# Altium PCB SD-TF.PcbDoc
Units mil, origin at the board's own origin, x right, y up, seen from the top; angles counter-clockwise.
Board outline 6000 x 4000 mil, 2 copper layers (Top Layer, Bottom Layer); 10 components, 13 nets, 51 pads, 10 vias.
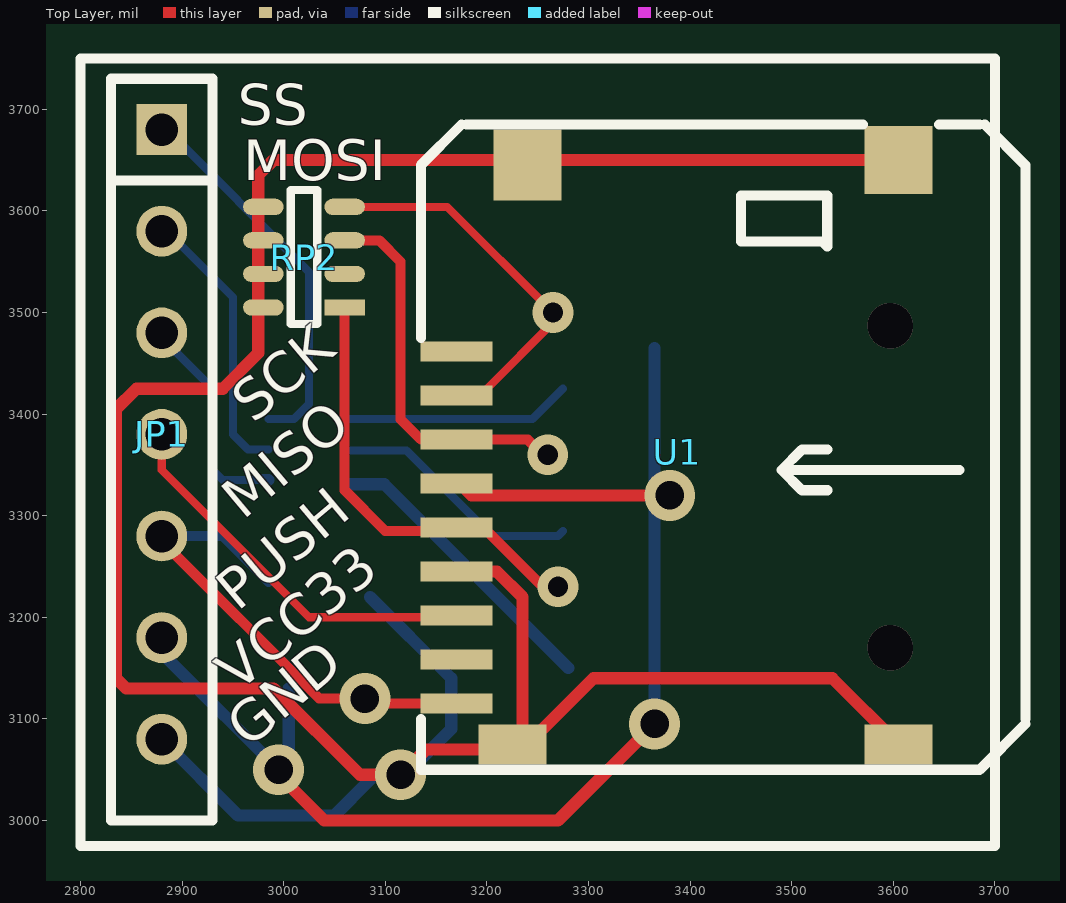
[diagram p0: Top Layer view]
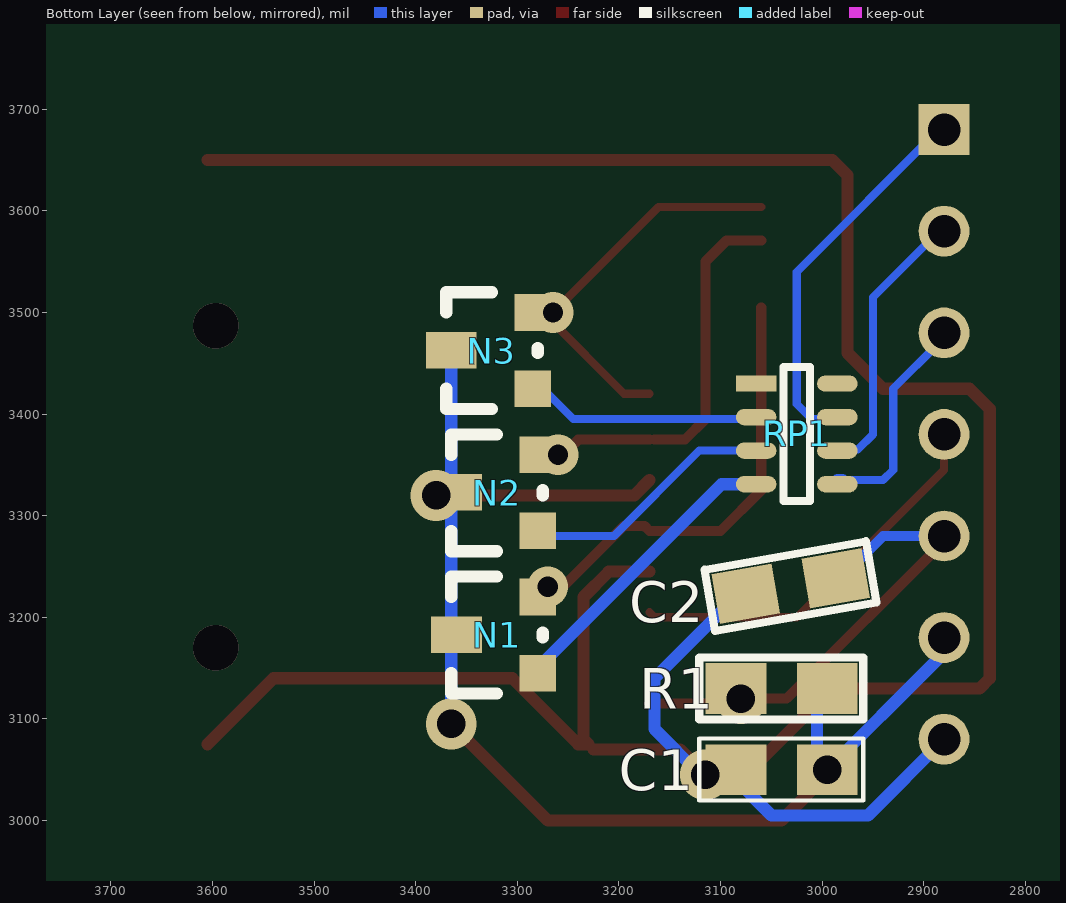
[diagram p1: Bottom Layer view, seen from below]

## Layer stack, top to bottom
Top Layer: signal copper 1.4
Dielectric: dielectric 12.6, FR-4, Dk 4.8
Bottom Layer: signal copper 1.4

## Board outline
1000,1000 7000,1000 7000,5000 1000,5000

## Design rules (kind name [scope] priority, off if disabled: settings)
Clearance [All] p1: gap=10
ComponentClearance [All] p1: gap=10 collisioncheckmode=3 verticalgap=10
PolygonConnect [All] p1: connectstyle=Relief reliefconductorwidth=10 reliefentries=4 polygonreliefangle="90 Angle"
RoutingVias [All] p1: holewidth=28 width=40 viastyle="Through Hole" minholewidth=20 minwidth=40 maxholewidth=28 maxwidth=50
SolderMaskExpansion [All] p1: expansion=4
TestPointUsage [All] p1: valid=0 allowmultiple=FALSE
Testpoint [All] p1: side=15 testpointundercomponent=TRUE minsize=40 maxsize=100 preferedsize=60 minholesize=0 maxholesize=40 preferedholesize=32 testpointgrid=1 style=1023 order=0123456789
Width [All] p1: maxlimit=12 minlimit=6 preferedwidth=10 minimp=50.000000 maximp=50.000000 favimp=50.000000
18 further rules are at their usual default settings.

## Components (designator, comment, footprint, x,y, rotation, side; value= is the part's Value field where it differs from the comment)
C1 "CAPA" RC100 3005,3040 r0 bottom
C2 "CAPA" 0805 3035,3225 r170 bottom
JP1 "7PIN" SIP7 2880,3680 r270 top
N1 "NPN-A" SOT-23A 3280,3145 r90 bottom
N2 "NPN-A" SOT-23A 3280,3285 r90 bottom
N3 "NPN-A" SOT-23A 3285,3425 r90 bottom
R1 "RES2A" 0805 3045,3125 r180 bottom
RP1 "RESPACK4" RN4 3065,3430 r180 bottom
RP2 "RESPACK4" RN4 3060,3505 r180 top
U1 "SD-MICRO" TF-2 3460,3475 r90 top

## Footprints (in the part's own frame and the unit in brackets; to place one, negate y for a bottom-side part, rotate by r counter-clockwise, add the part's x,y. Pads: shape width x height; smd on the part's side, far side on the other; paste and mask are expansions set on the pad)
0805 [mil]
  rect 60x50 smd: 1(50,5) 2(-40,5)
  silkscreen extent -76,-26 85,36
RC100 [mil]
  rect 60x50 smd: 1(-10,-10) 2(80,-10)
  silkscreen extent -45,-41 116,21
RN4 [mil]
  rect 40x16 smd: 1(0,0)
  oval 40x16 smd: 2(0,-33) 3(0,-66) 4(0,-99) 5(80,-99) 6(80,-66) 7(80,-33) 8(80,0)
  silkscreen extent 27,-116 53,16
SIP7 [mil]
  rect 50x50 hole 32: 1(0,0)
  round 50 hole 32: 2(100,0) 3(200,0) 4(300,0) 5(400,0) 6(500,0) 7(600,0)
  silkscreen extent -50,-50 680,50
SOT-23A [mil]
  rect 36x36 smd: B(0,0) E(75,0)
  rect 36x50 smd: C(38,80)
  silkscreen extent -20,-5 95,85
TF-2 [mm]
  rect 1x1.7 smd: 0(-10.16,-3.683) 0(-10.16,5.969)
  rect 1.778x1.7 smd: 0(4.318,5.588)
  rect 1.7x1.7 smd: 0(4.445,-3.683)
  rect 0.5x1.8 smd: 1(-0.344,7.366) 2(-1.444,7.366) 3(-2.544,7.366) 4(-3.644,7.366) 5(-4.744,7.366) 6(-5.844,7.366) 7(-6.944,7.366) 8(-8.044,7.366) 9(-9.144,7.366)
  silkscreen extent -10.79,-6.86 5.33,8.25

## Via types
v1: diameter 50, hole 28, Top Layer to Bottom Layer, 5 vias
v2: diameter 45, hole 45, Top Layer to Bottom Layer, 2 vias
v3: diameter 40, hole 20, Top Layer to Bottom Layer, 2 vias
v4: diameter 40, hole 20, Top Layer to Bottom Layer, tented top, 1 vias

## Nets (pads, with @x,y where several pads share a name; then routed paths per layer and width w, separated by ;. In a path a pad name is that pad's centre, name@x,y a point inside that pad or via, vN(x,y) a via of type N, cw(c..) or ccw(c..) an arc to the next point about the centre after c; other vN are vias at no path point)
GND: C1.2 C2.2 JP1.7 RP2.5 RP2.6 RP2.7 RP2.8 U1.0 U1.6 | length 2817.3
  Top Layer w12: U1.6 3210.08,3244.92 3235,3220 3235,3080 3230,3075 3240,3075 3305,3140 3540,3140 U1.0@3605,3075 ; U1.0@3225,3070 3140,3070 v1(3115,3045) 3075,3045 2990,3130 2845,3130 2835,3140 2835,3405 2855,3425 2940,3425 2975,3460 2975,3635 2990,3650 U1.0@3605,3650
  Bottom Layer w12: JP1.7 2955,3005 3050,3005 C1.2@3085,3040 ; C2.2@3085,3220 3165,3140 3165,3090 3120,3045 C1.2@3110,3045
MISO: JP1.4 U1.7 | length 397.1
  Top Layer w8: JP1.4 2880,3345 3025,3200 3165,3200 U1.7@3170,3205
  Bottom Layer w8: JP1.4@2880,3370 JP1.4
MOSI: JP1.2 RP1.6 | length 268.1
  Bottom Layer w8: JP1.2@2885,3580 2950,3515 2950,3380 2965,3365 RP1.6@2985,3365
NetN1_B: N1.B RP1.4 | length 290
  Bottom Layer w12: RP1.4 3099,3331 N1.B@3280,3150
NetN2_B: N2.B RP1.3 | length 246.9
  Bottom Layer w8: RP1.3 3121,3364 3205,3280 3270,3280 N2.B@3275,3285
NetN3_B: N3.B RP1.2 | length 222.4
  Bottom Layer w8: RP1.2@3065,3395 3245,3395 N3.B@3275,3425
PUSH: C2.1 JP1.5 R1.2 U1.9 | length 472.8
  Top Layer w10: JP1.5@2880,3275 3035,3120 v1@3075,3120 ; v1@3085,3115 U1.9
  Bottom Layer w10: JP1.5@2875,3280 2940,3280 C2.1@2985,3235
  other v1: 3080,3120
SCK: JP1.3 RP1.5 | length 202.8
  Bottom Layer w8: JP1.3@2885,3470 2930,3425 2930,3345 2940,3335 RP1.5@2980,3335
  Bottom Layer w12: RP1.5@2980,3335 RP1.5@2985,3335
SD_CS: N3.E RP2.4 U1.2 | length 379.1
  Top Layer w8: RP2.4 3161,3604 v3(3265,3500) ; U1.2@3170,3420 3195,3420 v3@3270,3495
SD_DI: N2.E RP2.3 U1.3 | length 368.1
  Top Layer w10: RP2.3 3094,3571 3115,3550 3115,3395 3135,3375 U1.3@3165,3375 ; U1.3 3240.16,3374.84 v3@3255,3360
  other v3: 3260,3360
SD_SCK: N1.E RP2.1 U1.5 | length 425.6
  Top Layer w10: RP2.1 3060,3325 3100,3285 3170,3285 3175,3290 3195,3290 v4@3260,3225
  other v4: 3270,3230
SS: JP1.1 RP1.7 | length 374.2
  Bottom Layer w8: JP1.1@2885,3680 3025,3540 3025,3410 3010,3395 RP1.7@2985,3395
VCC33: C1.1 JP1.6 N1.C N2.C N3.C R1.1 U1.4 | length 1291.8
  Top Layer w12: v1(2995,3050) 2995,3045 3040,3000 3270,3000 v1(3365,3095) ; U1.4@3170,3335 3185,3320 v1@3385,3320
  Bottom Layer w12: JP1.6@2885,3175 JP1.6@2895,3175 ; JP1.6@2885,3180 2885,3160 C1.1@3000,3045 ; C1.1@3005,3055 R1.1@3005,3130 ; v1(3365,3095) N3.C@3365,3465
  other v1: 3380,3320
pads on no net: RP1.1 RP1.8 RP2.2 U1.1 U1.8
copper on no net:
  other v2: 3596.97,3170 3596.97,3486.97

## Silkscreen, mask and mechanical layers (free items; w line width, h text height)
Top Overlay:
  lines w10: 2800,2975 2800,3750 3700,3750 3700,2975 2800,2975
  text "SS" at 2955,3685 h40
  text "MOSI" at 2960,3630 h40
  text "SCK" at 2970,3390 h40 r40
  text "MISO" at 2960,3295 h40 r40
  text "PUSH" at 2955,3205 h40 r40
  text "VCC33" at 2955,3125 h40 r40
  text "GND" at 2965,3070 h40 r40